# Altium PCB DamperSectionPCB.PcbDoc
Units mil, origin at the board's own origin, x right, y up, seen from the top; angles counter-clockwise.
Board outline 6000 x 6000 mil, 6 copper layers (Top Layer, Internal Plane 1, WireLayer 2, Internal Plane 2, Wire layer 3, Bottom Layer); 95 components, 69 nets, 301 pads, 27 vias.
Unrouted connection lines stored in the file: 68.
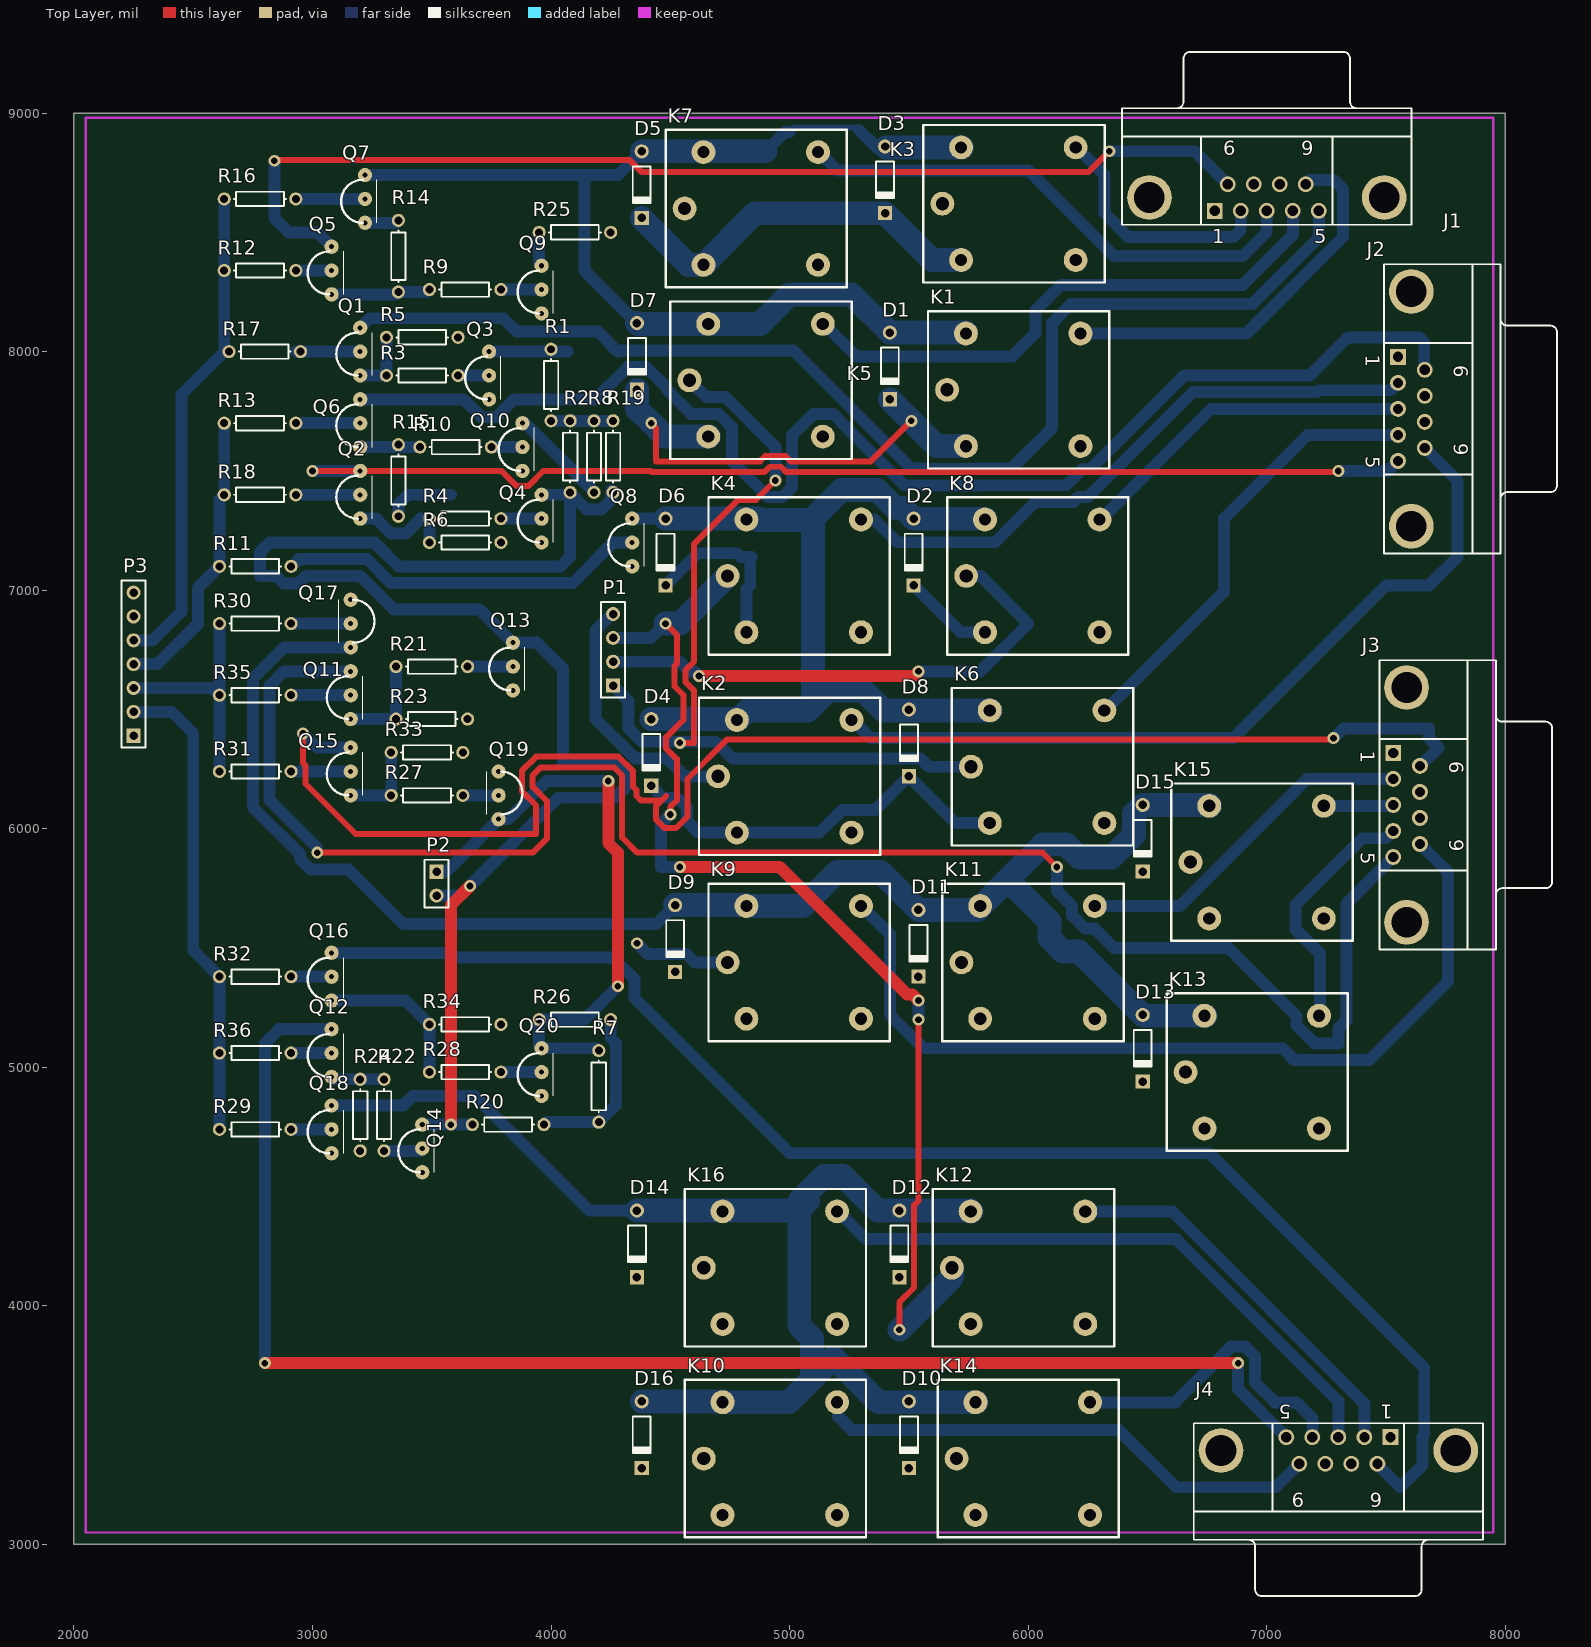
[diagram p0: Top Layer view]
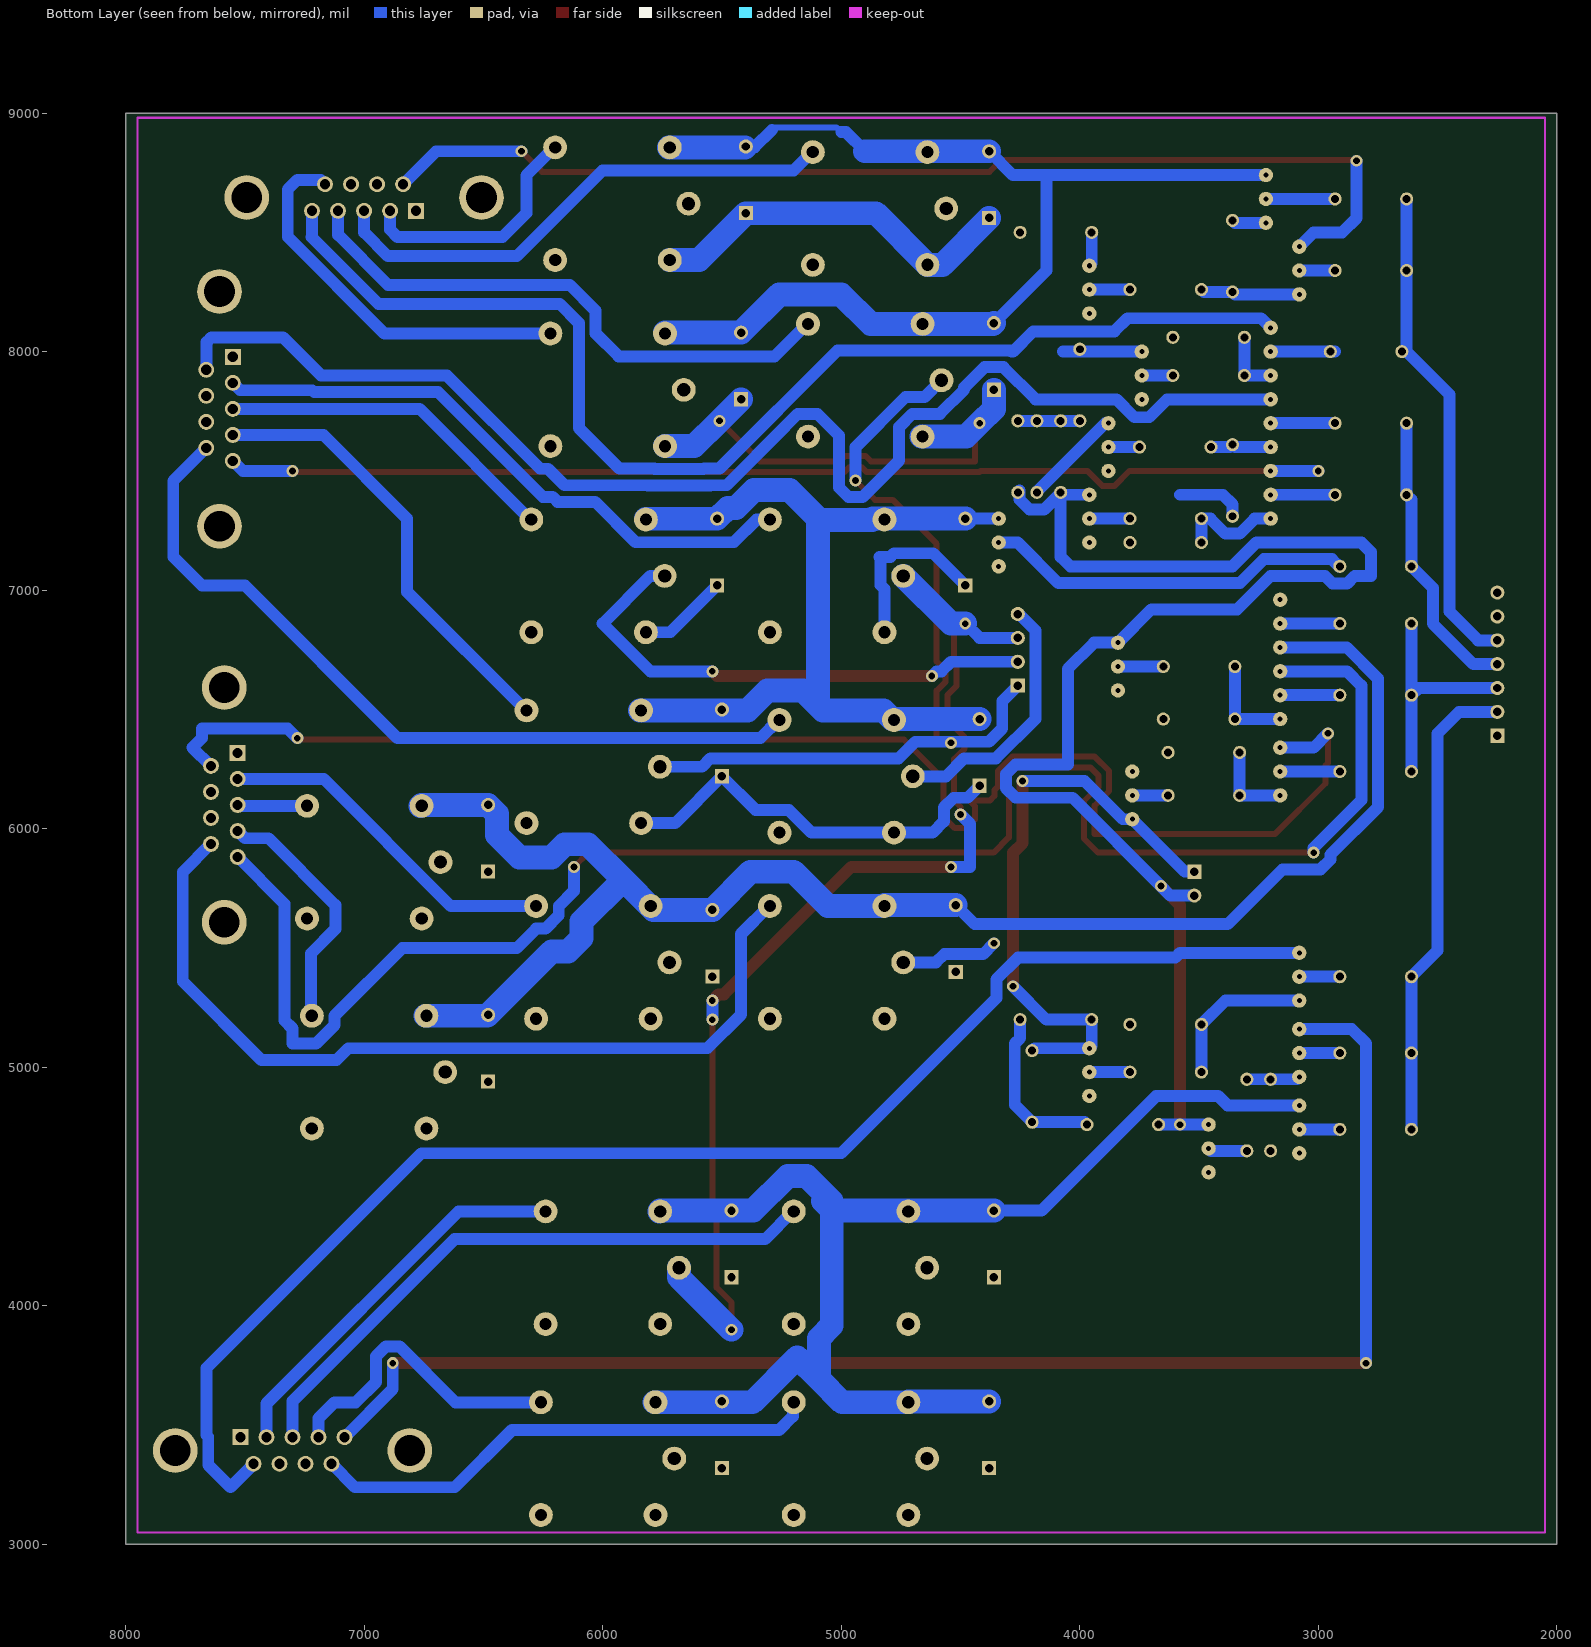
[diagram p1: Bottom Layer view, seen from below]
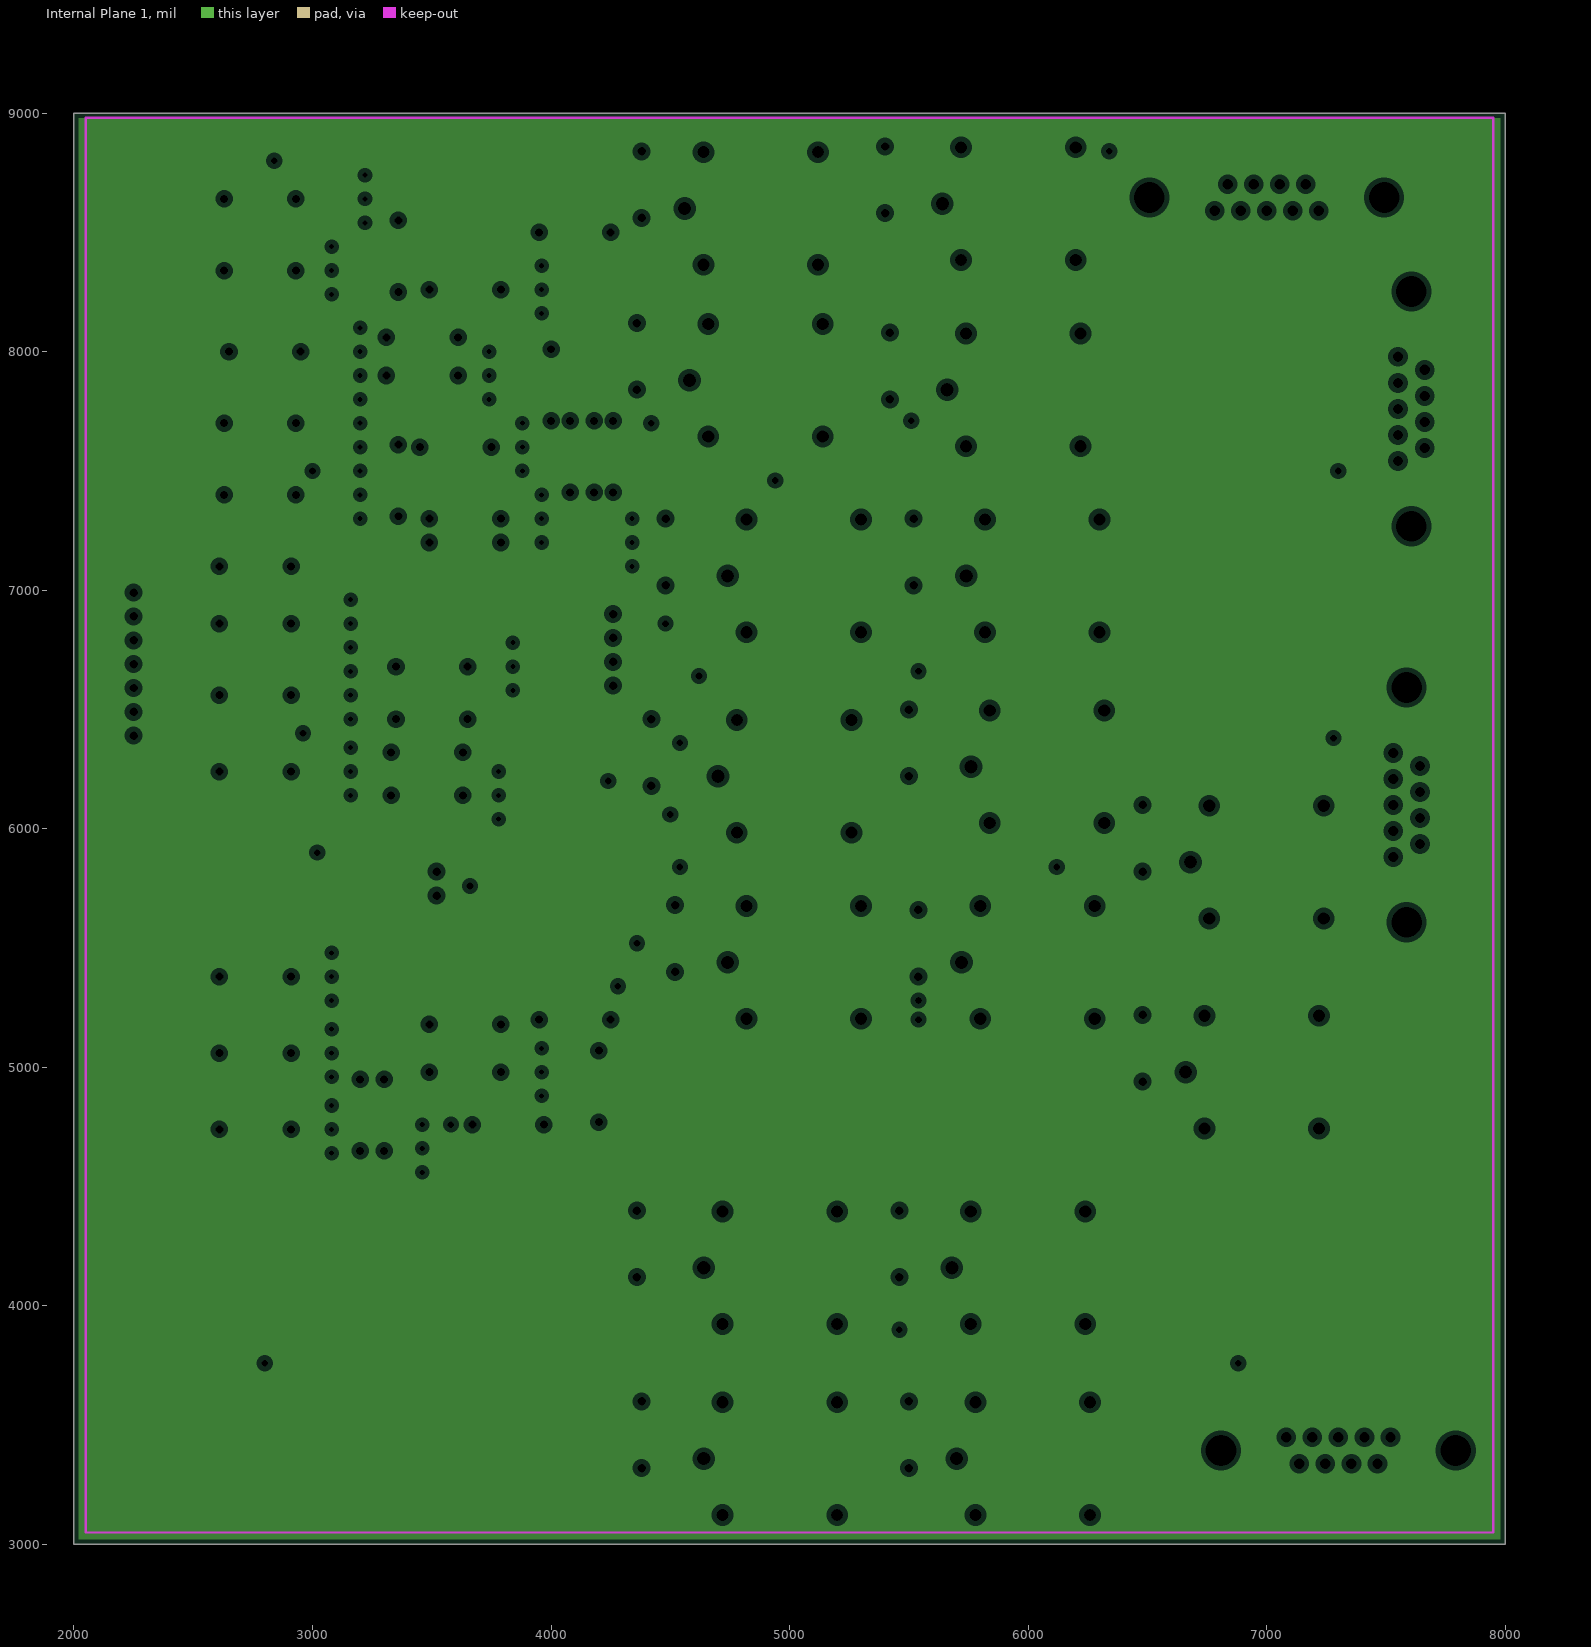
[diagram p2: Internal Plane 1, clearances drawn from the general rule]
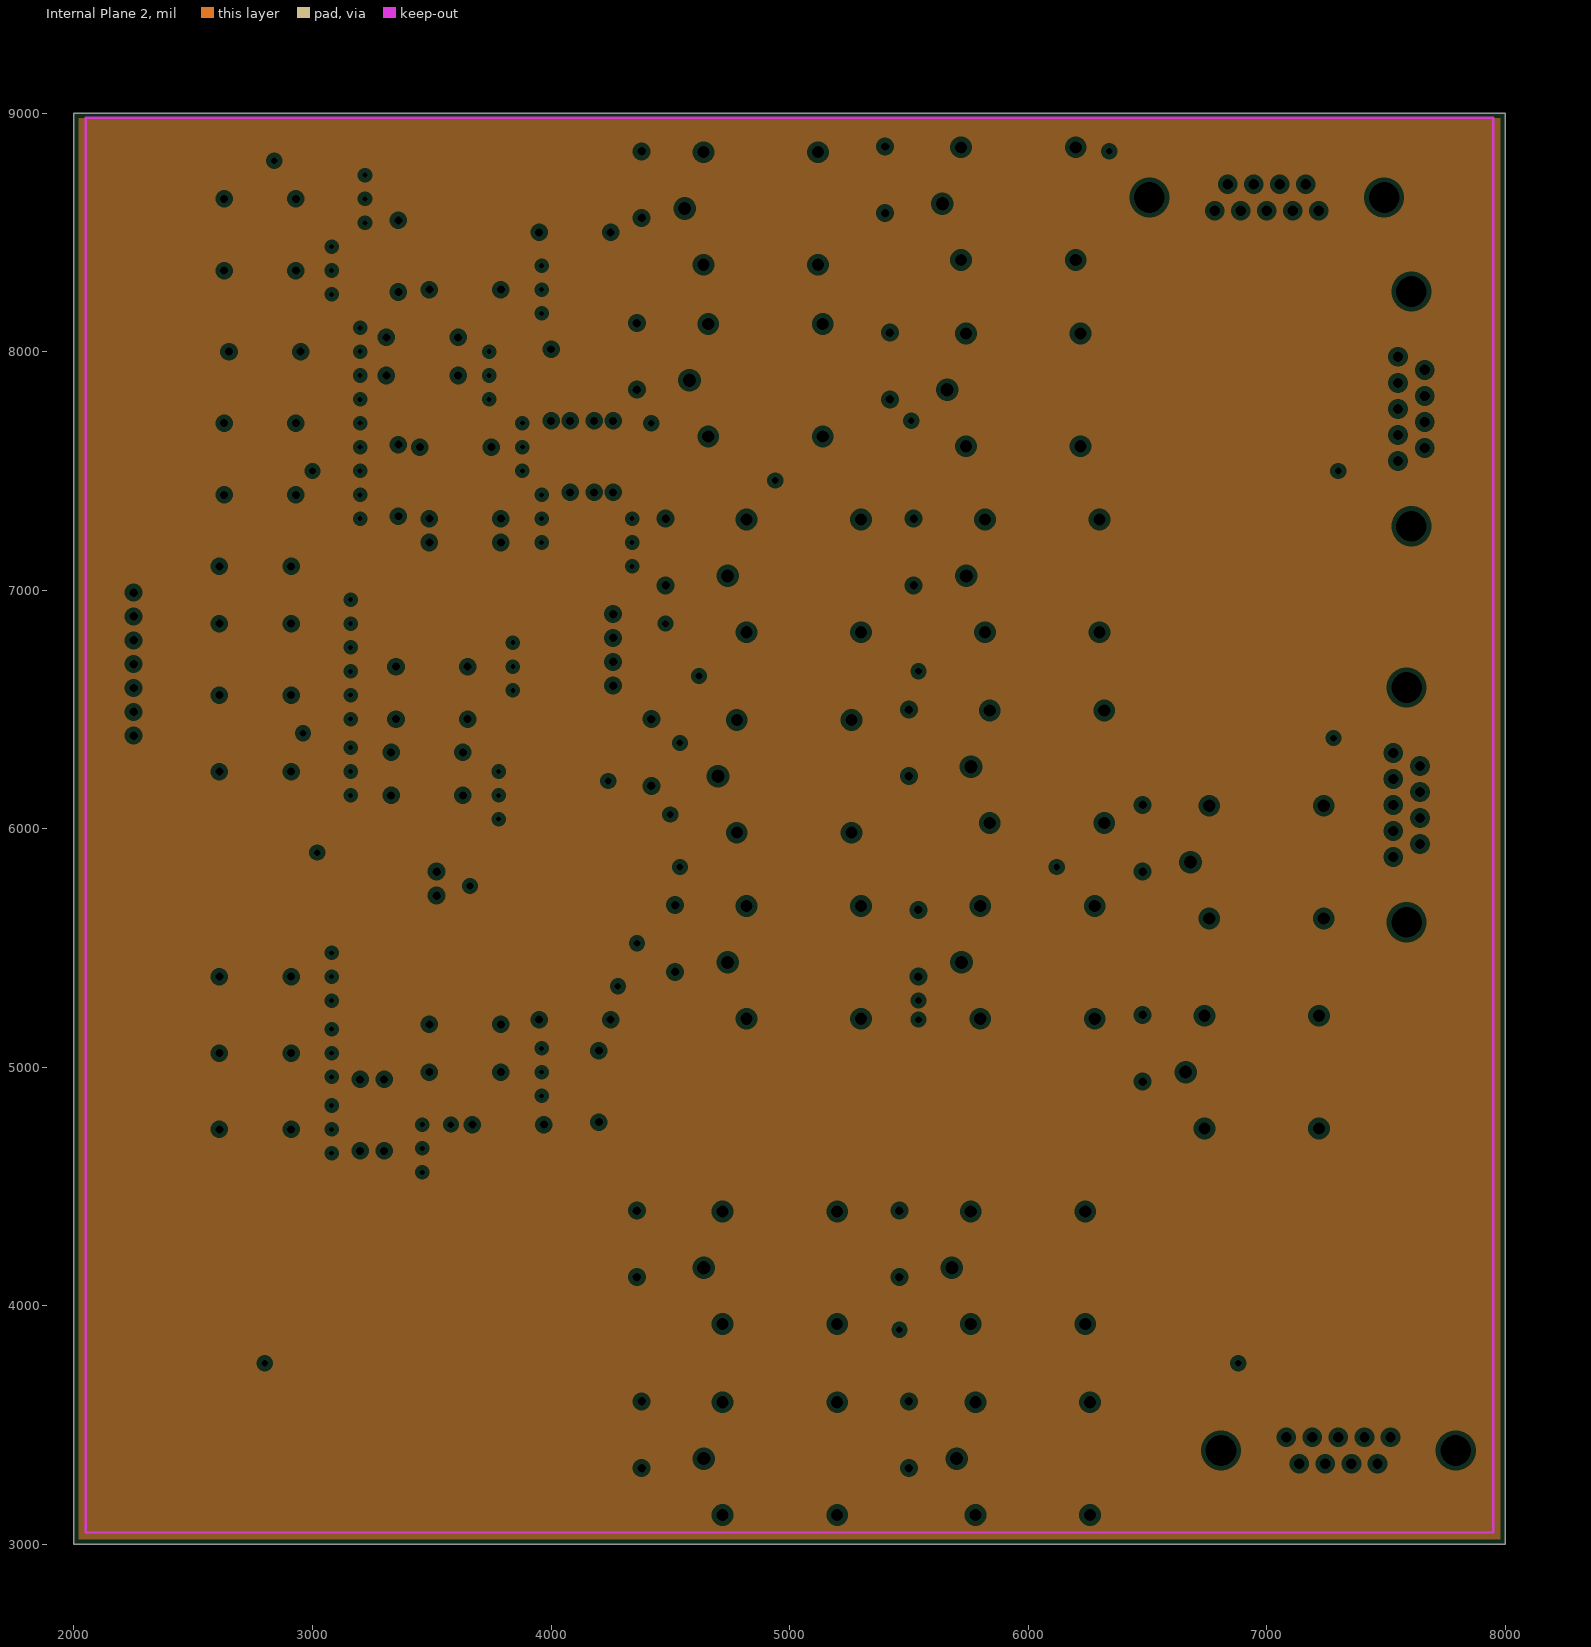
[diagram p3: Internal Plane 2, clearances drawn from the general rule]

## Layer stack, top to bottom
Top Layer: signal copper 1.4
Dielectric: core 12.6, FR-4, Dk 4.8
Internal Plane 1: plane copper 1.4
Dielectric: prepreg 12.6, FR-4, Dk 4.8
WireLayer 2: signal copper 1.4
Dielectric: core 12.6, FR-4, Dk 4.8
Internal Plane 2: plane copper 1.4
Dielectric: prepreg 12.6, FR-4, Dk 4.8
Wire layer 3: signal copper 1.4
Dielectric: core 12.6, FR-4, Dk 4.8
Bottom Layer: signal copper 1.4

## Board outline
2000,3000 8000,3000 8000,9000 2000,9000

## Design rules (kind name [scope] priority, off if disabled: settings)
Clearance [All] p1: gap=20
PlaneClearance [All] p1: clearance=20
PlaneConnect [All] p1: planeconnectstyle=Relief reliefexpansion=20 reliefentries=4 reliefconductorwidth=10 reliefairgap=10
PolygonConnect [All] p1: connectstyle=Relief reliefconductorwidth=10 reliefentries=4 polygonreliefangle="90 Angle"
RoomDefinition DamperSection [InComponentClass('DamperSection')] p1: confinementstyle=ConfineIn formatcopy=TRUE lockcomponents=FALSE outline 8045,3055 29405,3055 29405,4395 8045,4395
RoutingVias [All] p1: holewidth=32 width=62 viastyle="Through Hole" minholewidth=28 minwidth=50 maxholewidth=28 maxwidth=50
SilkscreenOverComponentPads [All] p1: minsilkscreentomaskgap=10
SolderMaskExpansion [All] p1: expansion=4
Width [All] p1: maxlimit=100 minlimit=25 preferedwidth=25 midlayer1_maxwidth=25 midlayer2_maxwidth=25 minimp=50.000000 maximp=50.000000 favimp=50.000000
25 further rules are at their usual default settings.

## Components (designator, comment, footprint, x,y, rotation, side; value= is the part's Value field where it differs from the comment)
D1 "Diode 1N4148" DO-35 5420,7940 r270 top
D2 "Diode 1N4148" DO-35 5520,7160 r270 top
D3 "Diode 1N4148" DO-35 5400,8720 r270 top
D4 "Diode 1N4148" DO-35 4420,6320 r270 top
D5 "Diode 1N4148" DO-35 4380,8700 r270 top
D6 "Diode 1N4148" DO-35 4480,7160 r270 top
D7 "Diode 1N4148" DO-35 4360,7980 r270 top
D8 "Diode 1N4148" DO-35 5500,6360 r270 top
D9 "Diode 1N4148" DO-35 4520,5540 r270 top
D10 "Diode 1N4148" DO-35 5500,3460 r270 top
D11 "Diode 1N4148" DO-35 5540,5520 r270 top
D12 "Diode 1N4148" DO-35 5460,4260 r270 top
D13 "Diode 1N4148" DO-35 6480,5080 r270 top
D14 "Diode 1N4148" DO-35 4360,4260 r270 top
D15 "Diode 1N4148" DO-35 6480,5960 r270 top
D16 "Diode 1N4148" DO-35 4380,3460 r270 top
J1 "D Connector 9" DSUB1.385-2H9 7000,9020 r0 top
J2 "D Connector 9" DSUB1.385-2H9 7980,7760 r270 top
J3 "D Connector 9" DSUB1.385-2H9 7960,6100 r270 top
J4 "D Connector 9" DSUB1.385-2H9 7300,3020 r180 top
K1 "SPDT" "Relay  SPDT Tayda" 5660,7840 r90 top
K2 "SPDT" "Relay  SPDT Tayda" 4700,6220 r90 top
K3 "SPDT" "Relay  SPDT Tayda" 5640,8620 r90 top
K4 "SPDT" "Relay  SPDT Tayda" 4740,7060 r90 top
K5 "SPDT" "Relay  SPDT Tayda" 4580,7880 r90 top
K6 "SPDT" "Relay  SPDT Tayda" 5760,6260 r90 top
K7 "SPDT" "Relay  SPDT Tayda" 4560,8600 r90 top
K8 "SPDT" "Relay  SPDT Tayda" 5740,7060 r90 top
K9 "SPDT" "Relay  SPDT Tayda" 4740,5440 r90 top
K10 "SPDT" "Relay  SPDT Tayda" 4640,3360 r90 top
K11 "SPDT" "Relay  SPDT Tayda" 5720,5440 r90 top
K12 "SPDT" "Relay  SPDT Tayda" 5680,4160 r90 top
K13 "SPDT" "Relay  SPDT Tayda" 6660,4980 r90 top
K14 "SPDT" "Relay  SPDT Tayda" 5700,3360 r90 top
K15 "SPDT" "Relay  SPDT Tayda" 6680,5860 r90 top
K16 "SPDT" "Relay  SPDT Tayda" 4640,4160 r90 top
P1 "Header 4" HDR1X4 4260,6600 r90 top
P2 "Header 2" HDR1X2 3520,5820 r270 top
P3 "Header 7" HDR1X7 2250,6390 r90 top
Q1 "2N3904" 2N3904 3200,7900 r90 top
Q2 "2N3904" 2N3904 3200,7300 r90 top
Q3 "2N3904" 2N3904 3740,7800 r90 top
Q4 "2N3904" 2N3904 3960,7200 r90 top
Q5 "2N3904" 2N3904 3080,8240 r90 top
Q6 "2N3904" 2N3904 3200,7600 r90 top
Q7 "2N3904" 2N3904 3220,8540 r90 top
Q8 "2N3904" 2N3904 4340,7100 r90 top
Q9 "2N3904" 2N3904 3960,8160 r90 top
Q10 "2N3904" 2N3904 3880,7500 r90 top
Q11 "2N3904" 2N3904 3160,6460 r90 top
Q12 "2N3904" 2N3904 3080,4960 r90 top
Q13 "2N3904" 2N3904 3840,6580 r90 top
Q14 "2N3904" 2N3904 3460,4560 r90 top
Q15 "2N3904" 2N3904 3160,6140 r90 top
Q16 "2N3904" 2N3904 3080,5280 r90 top
Q17 "2N3904" 2N3904 3160,6960 r270 top
Q18 "2N3904" 2N3904 3080,4640 r90 top
Q19 "2N3904" 2N3904 3780,6240 r270 top
Q20 "2N3904" 2N3904 3960,4880 r90 top
R1 "Res1" AXIAL-0.3 4000,7860 r270 top
R2 "Res1" AXIAL-0.3 4080,7560 r90 top
R3 "Res1" AXIAL-0.3 3460,7900 r0 top
R4 "Res1" AXIAL-0.3 3640,7300 r0 top
R5 "Res1" AXIAL-0.3 3460,8060 r180 top
R6 "Res1" AXIAL-0.3 3640,7200 r180 top
R7 "Res1" AXIAL-0.3 4200,4920 r270 top
R8 "Res1" AXIAL-0.3 4180,7560 r90 top
R9 "Res1" AXIAL-0.3 3640,8260 r0 top
R10 "Res1" AXIAL-0.3 3600,7600 r0 top
R11 "Res1" AXIAL-0.3 2760,7100 r0 top
R12 "Res1" AXIAL-0.3 2780,8340 r0 top
R13 "Res1" AXIAL-0.3 2780,7700 r0 top
R14 "Res1" AXIAL-0.3 3360,8400 r270 top
R15 "Res1" AXIAL-0.3 3360,7460 r90 top
R16 "Res1" AXIAL-0.3 2780,8640 r0 top
R17 "Res1" AXIAL-0.3 2800,8000 r0 top
R18 "Res1" AXIAL-0.3 2780,7400 r0 top
R19 "Res1" AXIAL-0.3 4260,7560 r90 top
R20 "Res1" AXIAL-0.3 3820,4760 r0 top
R21 "Res1" AXIAL-0.3 3500,6680 r0 top
R22 "Res1" AXIAL-0.3 3300,4800 r270 top
R23 "Res1" AXIAL-0.3 3500,6460 r180 top
R24 "Res1" AXIAL-0.3 3200,4800 r90 top
R25 "Res1" AXIAL-0.3 4100,8500 r0 top
R26 "Res1" AXIAL-0.3 4100,5200 r0 top
R27 "Res1" AXIAL-0.3 3480,6140 r0 top
R28 "Res1" AXIAL-0.3 3640,4980 r0 top
R29 "Res1" AXIAL-0.3 2760,4740 r0 top
R30 "Res1" AXIAL-0.3 2760,6860 r0 top
R31 "Res1" AXIAL-0.3 2760,6240 r0 top
R32 "Res1" AXIAL-0.3 2760,5380 r0 top
R33 "Res1" AXIAL-0.3 3480,6320 r180 top
R34 "Res1" AXIAL-0.3 3640,5180 r180 top
R35 "Res1" AXIAL-0.3 2760,6560 r0 top
R36 "Res1" AXIAL-0.3 2760,5060 r0 top

## Footprints (in the part's own frame and the unit in brackets; to place one, negate y for a bottom-side part, rotate by r counter-clockwise, add the part's x,y. Pads: shape width x height; smd on the part's side, far side on the other; paste and mask are expansions set on the pad)
2N3904 [mil] "simple transistor, but bigger holes and pads"
  round 60 hole 21: 1(0,0) 2(100,0) 3(200,0)
  silkscreen extent 0,-50 180,100
AXIAL-0.3 [mm] "Axial Device, Thru-Hole; 2 Leads; 0.3 in Pin Spacing"
  round 1.4 hole 0.85: 1(-3.81,0) 2(3.81,0)
  silkscreen extent -2.77,-0.76 2.77,0.76
DO-35 [mm] "Diode, Axial; Body 3.8 x 1.9 mm (LxDia. max), Lead Dia. 0.53 mm (max)"
  round 1.5 hole 0.9: 1(-3.55,0)
  rect 1.5x1.5 hole 0.9: 2(3.55,0)
  silkscreen extent -1.95,-0.95 2.05,0.95
DSUB1.385-2H9 [mm] "Connector; D Subminiature; 9 Position; Right Angle; Pitch 1.385 mm"
  rect 1.69x1.69 hole 1.09: 1(-5.54,-10.92)
  round 1.69 hole 1.09: 2(-2.77,-10.92) 3(0,-10.92) 4(2.77,-10.92) 5(5.54,-10.92) 6(-4.155,-8.08) 7(-1.385,-8.08) 8(1.385,-8.08) 9(4.155,-8.08)
  round 4.76 hole 3.26: 10(-12.495,-9.5) 11(12.495,-9.5)
  silkscreen extent -15.4,-12.4 15.4,6
HDR1X2 [mm] "Connector; Header; 2 Position"
  rect 1.5x1.5 hole 0.9: 1(0,0)
  round 1.5 hole 0.9: 2(2.54,0)
  silkscreen extent -1.27,-1.27 3.81,1.27
HDR1X4 [mm] "Connector; Header; 4 Position"
  rect 1.5x1.5 hole 0.9: 1(0,0)
  round 1.5 hole 0.9: 2(2.54,0) 3(5.08,0) 4(7.62,0)
  silkscreen extent -1.27,-1.27 8.89,1.27
HDR1X7 [mm] "Connector; Header; 7 Position"
  rect 1.5x1.5 hole 0.9: 1(0,0)
  round 1.5 hole 0.9: 2(2.54,0) 3(5.08,0) 4(7.62,0) 5(10.16,0) 6(12.7,0) 7(15.24,0)
  silkscreen extent -1.27,-1.27 16.51,1.27
"Relay  SPDT Tayda" [mm] "this is the ATTC-3372"
  round 2.54 hole 1.4: 0(0,0)
  round 2.54 hole 1.3: 1(6,-2) 2(-6,-2) 3(6,-14.2) 4(-6,-14.2)
  silkscreen extent -8.38,-17.27 8.38,2.03

## Part data
D1 D2 D3 D4 D5 D6 D7 D8 D9 D10 D11 D12 D13 D14 D15 D16: "High Conductance Fast Diode"
J1 J2 J3 J4: "Receptacle Assembly, 9 Position, Right Angle"
P1: "Header, 4-Pin"
P2: "Header, 2-Pin"
P3: "Header, 7-Pin"
Q1 Q2 Q3 Q4 Q5 Q6 Q7 Q8 Q9 Q10 Q11 Q12 Q13 Q14 Q15 Q16 Q17 Q18 Q19 Q20: "NPN General Purpose Amplifier"
R1 R2 R3 R4 R5 R6 R7 R8 R9 R10 R11 R12 R13 R14 R15 R16 R17 R18 R19 R20 R21 R22 R23 R24 R25 R26 R27 R28 R29 R30 R31 R32 R33 R34 R35 R36: "Resistor"

## Via types
v1: diameter 50, hole 28, Top Layer to Bottom Layer, 27 vias

## Nets (pads, with @x,y where several pads share a name; then routed paths per layer and width w, separated by ;. In a path a pad name is that pad's centre, name@x,y a point inside that pad or via, vN(x,y) a via of type N, cw(c..) or ccw(c..) an arc to the next point about the centre after c; other vN are vias at no path point)
BUTTONCLOSEBUS: P2.2 Q3.3 Q4.3 Q13.3 Q14.3 R1.1 R2.1 R19.1 R20.1 | length 6879.3
  Top Layer w50: v1(3580,4760) 3580,5680 v1(3660,5760)
  Bottom Layer w50: Q14.3 v1(3580,4760) R20.1 ; P2.2 3620,5720 v1(3660,5760) 4030,6130 4268.99,6130 4310,6171.01 4310,6228.99 4268.99,6270 4050,6270 4050,6670 3940,6780 Q13.3 3700,6920 3340,6920 3200,7060 2972.61,7060 2940.05,7027.44 2879.95,7027.44 2847.39,7060 2780,7060 2780,7160 2820,7200 3260,7200 3360,7100 4040,7100 4080,7140 R2.1@4080,7407.39 ; Q3.3 4070,8000 ; Q4.3 4070,7400 R2.1 R2.1@4080,7407.39 ; R19.1 4252.56,7417.44 4252.56,7379.95 4210.05,7337.44 4149.95,7337.44 R2.1@4080,7407.39
BUTTONOPENBUS: P2.1 Q9.3 Q10.3 Q19.3 Q20.3 R7.1 R8.1 R25.1 R26.1 | length 3076
  Top Layer w50: v1(4240,6200) 4240,5940 4280,5900 v1(4280,5340)
  Bottom Layer w50: P2.1 3560,5820 Q19.3 3820,6040 3980,6200 v1(4240,6200) ; Q10.3 3892.61,7700 4180,7412.61 R8.1 ; R25.1 3950,8370 Q9.3 ; R7.1 4190,5080 Q20.3 3950,5090 R26.1 4140,5200 v1(4280,5340)
COILA1BUS: K1.0 K2.0 K9.0 K10.0 P1.4 | length 1500.6
  Bottom Layer w50: P1.4 4254.6,6900 4185.47,6830.87 4185.47,6460.95 4351.65,6294.76 4485.24,6294.76 4560,6220 K2.0 ; v1(4360,5520) 4405.24,5474.76 4568.17,5474.76 4602.93,5440 K9.0
COILA2BUS: K3.0 K4.0 K11.0 K12.0 P1.3 | length 4799.1
  Top Layer w25: v1(4480,6860) 4527.03,6812.97 4527.03,6691.98 4517.5,6682.46 4517.5,6597.54 4555,6560.04 4555,6456.32 4482.5,6383.82 4482.5,6336.18 4527.03,6291.66 4527.03,6118.61 4500,6091.58 v1(4500,6060) ; v1(5460,3900) 5460,4015.22 5522.03,4077.25 5522.03,4422.03 5540,4440 v1(5540,5200)
  Top Layer w50: v1(4540,5840) 4957.54,5840 5491.83,5305.71 5514.29,5305.71 v1(5540,5280)
  Bottom Layer w50: P1.3 4420,6800 v1(4480,6860) ; v1(4500,6060) 4460,6020 4460,5840 v1(4540,5840) ; v1(5540,5200) v1(5540,5280)
  Bottom Layer w100: v1(4480,6860) 4540,6860 K4.0 ; v1(5460,3900) 5680,4120 K12.0
COILB1BUX: K7.0 K8.0 K15.0 K16.0 P1.2 | length 2198.8
  Top Layer w50: v1(4620,6640) 5520,6640 v1(5540,6660)
  Bottom Layer w50: P1.2 4540,6700 4580,6660 4600,6660 v1(4620,6640) ; v1(5540,6660) 5800,6660 6000,6860 5800,7060 K8.0
COILB2BUS: K5.0 K6.0 K13.0 K14.0 P1.1 | length 3699.5
  Top Layer w25: v1(4540,6360) 4600,6360 4600,6578.68 4562.5,6616.18 4562.5,6663.82 4600,6701.32 4600,7194.15 4784.57,7378.72 4858.72,7378.72 v1(4940,7460)
  Bottom Layer w50: P1.1 4325,6535 4325,6420.41 4380.65,6364.76 4689.59,6364.76 4759.59,6294.76 5548.17,6294.76 5582.93,6260 K6.0 ; K5.0 4651,7809 4731.35,7809 4940,7600.35 v1(4940,7460)
DAMPER1: P3.5 R12.1 R16.1 R17.1 | length 2054.3
  Bottom Layer w50: P3.5 2330,6790 2450,6910 2450,7820 2630,8000 R12.1 R16.1
DAMPER2: P3.4 R11.1 R13.1 R18.1 | length 1226
  Bottom Layer w50: P3.4 2350,6690 2520,6860 2520,7010 R11.1 2610,7380 R18.1 R13.1
DAMPER3: P3.3 R30.1 R31.1 R35.1 | length 992.4
  Bottom Layer w50: P3.3 2580,6590 R35.1 ; R31.1 R35.1 ; R30.1 R35.1
DAMPER4: P3.2 R29.1 R32.1 R36.1 | length 1992.8
  Bottom Layer w50: P3.2 2410,6490 2500,6400 2500,5490 R32.1 R36.1 R29.1
GND: J1.10 J1.11 J2.10 J2.11 J3.10 J3.11 J4.10 J4.11 P3.1 Q3.1 Q4.1 Q7.1 Q8.1 Q9.1 Q10.1 Q13.1 Q14.1 Q17.1 Q18.1 Q19.1 Q20.1 R5.1 R6.1 R14.1 R15.1 R23.1 R24.1 R33.1 R34.1 | length 416.6
  Bottom Layer w50: Q7.1 R14.1@3350,8540 ; R15.1 3360,7360 3400,7400 3580,7400
NetD1_1: D1.1 D3.1 D5.1 D7.1 K1.1 K3.1 K5.1 K7.1 Q7.3 | length 4822.7
  Bottom Layer w25: 5000,8920 5020,8940 5280,8940 5290,8930
  Bottom Layer w50: Q7.3 4140,8740 ; D7.1 4140,8339.76 4140,8740 ; D5.1 4280.24,8740 4140,8740 ; 4900,8840 4980,8920 5000,8920 ; 5290,8930 5364,8856 D3.1@5403.76,8856
  Bottom Layer w100: D7.1 4363.76,8116 4876,8116 5000,8240 5259.76,8240 D1.1 K1.1@5739.24,8079.76 ; D5.1 K7.1@4679.24,8839.76 ; K7.1@4687,8840 4900,8840 ; D3.1@5403.76,8856 K3.1@5723,8856
NetD2_1: D2.1 D4.1 D6.1 D8.1 K2.1 K4.1 K6.1 K8.1 Q8.3 | length 3858.5
  Bottom Layer w50: Q8.3 D6.1@4479.76,7300
  Bottom Layer w100: D4.1 4786.76,6459.76 4823,6496 5076,6496 5160,6580 5308.71,6580 5392.71,6496 K6.1@5843,6496 ; D6.1@4479.76,7300 4866.65,7300 4871.65,7295 5092.29,7295 5097.29,7300 ; 5097.29,6532 5097.29,7300 ; K8.1@5819.24,7299.76 D2.1 5474.76,7345 5440.65,7345 5365.65,7420 5217.29,7420 5097.29,7300
NetD9_1: D9.1 D11.1 D13.1 D15.1 K9.1 K11.1 K13.1 K15.1 Q17.3 | length 6776.8
  Bottom Layer w50: Q17.3 2881.01,6760 2750,6628.99 2750,6091.01 2950,5891.01 2950,5871.01 2991.01,5830 3150,5830 3380,5600 4440.24,5600 D9.1
  Bottom Layer w100: D9.1 4819.24,5679.76 4823,5676 5056,5676 5200,5820 5379.76,5820 D11.1 5786.76,5659.76 5907,5780 ; D13.1 6213.54,5486.22 6144.7,5486.22 6089.06,5541.87 6089.06,5610.71 5919.76,5780 5907,5780 ; D13.1@6483.76,5216 K13.1@6743,5216 ; K15.1@6763,6096 6759.24,6099.76 D15.1 6443,6062.76 6443,5974.29 6348.71,5880 6214.35,5880 6159.35,5935 6062,5935 5907,5780
NetD10_1: D10.1 D12.1 D14.1 D16.1 K10.1 K12.1 K14.1 K16.1 Q18.3 | length 5381.7
  Bottom Layer w50: Q18.3 3380,4840 3420,4880 3680,4880 4160.24,4399.76 D14.1
  Bottom Layer w100: D14.1 5037.06,4399.76 5077.29,4440 ; D16.1 K10.1@4719.24,3599.76 ; K10.1@4723,3596 4996,3596 5093.29,3693.29 ; K12.1@5763,4396 5759.24,4399.76 D12.1 5368.94,4399.76 5223.71,4545 5145,4545 5040,4440 5040,3917.29 5093.29,3864 5093.29,3693.29 ; K14.1@5783,3596 5372.71,3596 5184.35,3784.35 5093.29,3693.29
NetJ1_2: J1.2 K3.3 | length 1028.8
  Bottom Layer w50: K3.3@6203,8856 6320,8739 6320,8580 6420,8480 6860,8480 6890.94,8510.94 J1.2
NetJ1_3: J1.3 K7.3 | length 2189.1
  Bottom Layer w50: K7.3@5123,8836 5199,8760 6000,8760 6360,8400 6900,8400 7000,8500 J1.3
NetJ1_4: J1.4 K5.3 | length 2390.1
  Bottom Layer w50: K5.3@5143,8116 5279,7980 5933.35,7980 6030,8076.65 6030,8171.99 6138.01,8280 6900,8280 7109.06,8489.06 J1.4
NetJ1_5: J1.5 Q1.3 | length 5073.3
  Bottom Layer w50: Q1.3 3240,8140 3800,8140 3855,8085 4195,8085 4280,8000 4286.42,8000 4291.65,8005.24 5015.11,8005.24 5510.35,7510 5575.89,7510 5577.11,7508.78 5782.13,7508.78 5783.35,7510 5930,7510 6100,7680 6100,8120 6180,8200 6940,8200 7220,8480 7218.11,8481.89 J1.5
NetJ1_6: J1.6 Q5.3 | length 4640.5
  Top Layer w25: v1(2840,8800) 2842.5,8802.5 4329.54,8802.5 4378.54,8753.5 6253.5,8753.5 v1(6340,8840)
  Bottom Layer w50: v1(2840,8800) 2840,8560 2900,8500 3020,8500 Q5.3 ; v1(6340,8840) 6698.31,8840 J1.6
NetJ1_9: J1.9 K1.3 | length 1644.2
  Bottom Layer w50: K1.3@6223,8076 6914.99,8076 7320,8481.01 7320,8680 7280,8720 7181.69,8720 J1.9
NetJ2_2: J2.2 K4.3 | length 2563.1
  Bottom Layer w50: K4.3@5303,7296 5355.3,7296 5450.3,7201 5862.35,7201 6031.35,7370 6188.99,7370 6209.99,7391 6251,7391 6690,7830 7208.99,7830 7217.26,7838.27 7519.29,7838.27 J2.2
NetJ2_3: J2.3 K8.3 | length 1439.3
  Bottom Layer w50: K8.3@6303,7296 6767,7760 J2.3
NetJ2_4: J2.4 K6.3 | length 1885.3
  Bottom Layer w50: K6.3@6323,6496 6820,6993 6820,7300 7170.94,7650.94 J2.4
NetJ2_5: J2.5 Q2.3 | length 4842
  Top Layer w25: v1(3000,7500) Q2.3 3791.61,7500 3854.11,7437.5 3905.89,7437.5 3968.39,7500 4416.36,7500 4421.36,7495 4893.68,7495 4916.18,7517.5 4963.82,7517.5 4986.32,7495 7295,7495 v1(7300,7500)
  Bottom Layer w50: v1(3000,7500) Q2.3 ; v1(7300,7500) 7508.19,7500 J2.5
NetJ2_6: J2.6 Q6.3 | length 5671.7
  Bottom Layer w50: Q6.3 3633.93,7800 3708.93,7725 3771.07,7725 3846.07,7800 4185.41,7800 4320.65,7935.24 4399.35,7935.24 4485,7849.59 4485,7840.65 4586.65,7739 4702.35,7739 4758,7683.35 4758,7543.01 4911.01,7390 4968.99,7390 5010,7431.01 5010,7649.07 5099.93,7739 5182.35,7739 5238,7683.35 5238,7682 5480,7440 5546.89,7440 5548.11,7438.78 5811.12,7438.78 5812.35,7440 6160,7440 6229,7509 6262.35,7509 6653.35,7900 7180,7900 7340,8060 7640,8060 7660,8040 7660,7925.47 J2.6
NetJ2_9: J2.9 K2.3 | length 3396.9
  Bottom Layer w50: K2.3@5263,6456 5339,6380 6860,6380 7500,7020 7680,7020 7800,7140 7800,7458.31 J2.9
NetJ3_2: J3.2 K11.3 | length 1467.9
  Bottom Layer w50: K11.3@6283,5676 6636,5676 7169.06,6209.06 J3.2
NetJ3_3: J3.3 K15.3 | length 288.7
  Bottom Layer w50: K15.3@7243,6096 7526.08,6096 J3.3
NetJ3_4: J3.4 K13.3 | length 1045.5
  Bottom Layer w50: K13.3@7223,5216 7223,5477 7120,5580 7120,5680 7400.16,5960.16 7499.29,5960.16 J3.4
NetJ3_5: J3.5 Q11.3 | length 7429.1
  Top Layer w25: v1(3020,5900) 3923.64,5900 3982.5,5958.86 3982.5,6116.18 3922.5,6176.18 3922.5,6223.82 3956.18,6257.5 4263.82,6257.5 4297.5,6223.82 4297.5,5963.82 4361.32,5900 6060,5900 v1(6120,5840)
  Bottom Layer w50: v1(3020,5900) 3020,5920 2820,6120 2820,6600 2880,6660 Q11.3 ; v1(6120,5840) 6120,5740 6184.06,5675.94 6184.06,5636.87 6239.7,5581.22 6278.78,5581.22 6360,5500 6840,5500 7124.06,5215.94 7124.06,5176.87 7200.93,5100 7300,5100 7300,5162.82 7334.06,5196.87 7334.06,5685.87 J3.5
NetJ3_6: J3.6 Q15.3 | length 6367
  Top Layer w25: v1(2960,6400) 2960,6274.94 2970.06,6264.88 2970.06,6189.94 3182.5,5977.5 3937.5,5977.5 3937.5,6097.54 3877.5,6157.54 3877.5,6242.46 3937.54,6302.5 4282.46,6302.5 4342.5,6242.46 4342.5,6177.5 4357.97,6162.03 4357.97,6137.25 4377.01,6118.21 4462.99,6118.21 ; 4482.03,6137.25 4439.21,6094.43 4439.21,6039.47 4476.18,6002.5 4523.82,6002.5 4572.03,6050.71 4572.03,6208.7 4736.83,6373.5 7273.5,6373.5 v1(7280,6380)
  Bottom Layer w50: v1(2960,6400) 3020,6340 Q15.3 ; v1(7280,6380) 7320,6420 7680,6420 7680,6380 7720,6340 7643.58,6263.58 J3.6
NetJ3_9: J3.9 K9.3 | length 3684.6
  Bottom Layer w50: K9.3@5303,5676 5420,5559 5420,5221.01 5561.01,5080 7066.28,5080 7116.28,5030 7430,5030 7760,5360 7760,5818.31 J3.9
NetJ4_2: J4.2 K12.3 | length 1640.5
  Bottom Layer w50: K12.3@6243,4396 6604,4396 7409.06,3590.94 J4.2
NetJ4_3: J4.3 K16.3 | length 2577.4
  Bottom Layer w50: K16.3@5203,4396 5319,4280 6621.01,4280 7300,3601.01 J4.3
NetJ4_4: J4.4 K14.3 | length 1292
  Bottom Layer w50: K14.3@6263,3596 6617.01,3596 6851.01,3830 6908.99,3830 6950,3788.99 6950,3680.81 7034.81,3596 7124,3596 7190.94,3529.05 J4.4
NetJ4_5: J4.5 Q12.3 | length 6118.6
  Top Layer w50: v1(2800,3760) v1(6880,3760)
  Bottom Layer w50: v1(2800,3760) 2800,5100 2860,5160 Q12.3 ; v1(6880,3760) 6880,3651.81 J4.5
NetJ4_6: J4.6 Q16.3 | length 6026.5
  Bottom Layer w50: Q16.3 3580,5480 3600,5460 4258.99,5460 4350,5368.99 4350,5290 5000,4640 6760,4640 7660,3740 7660,3458.24 7653.23,3451.47 7653.23,3333.23 7560,3240 7463.58,3336.42 J4.6
NetJ4_9: J4.9 K10.3 | length 2156.1
  Bottom Layer w50: K10.3@5203,3596 5203,3537 5260,3480 6380,3480 6620,3240 7038.31,3240 J4.9
NetQ1_1: Q1.1 R3.1 R5.2 | length 270
  Bottom Layer w50: Q1.1 R3.1 R5.2
NetQ1_2: Q1.2 R17.2 | length 270
  Bottom Layer w50: R17.2@2930,8000 Q1.2
NetQ2_1: Q2.1 R4.1 R6.2 | length 441.8
  Bottom Layer w50: Q2.1 3267.39,7300 3329.95,7237.44 3390.05,7237.44 3452.61,7300 R4.1 R6.2
NetQ2_2: Q2.2 R18.2 | length 270
  Bottom Layer w50: R18.2 Q2.2
NetQ3_2: Q3.2 R3.2 | length 130
  Bottom Layer w50: R3.2 Q3.2
NetQ4_2: Q4.2 R4.2 | length 170
  Bottom Layer w50: R4.2 Q4.2
NetQ5_1: Q5.1 R9.1 R14.2 | length 404.1
  Bottom Layer w50: Q5.1 3350,8240 R14.2 R9.1@3480,8250
NetQ5_2: Q5.2 R12.2 | length 150
  Bottom Layer w50: R12.2 Q5.2
NetQ6_1: Q6.1 R10.1 R15.2 | length 258.3
  Bottom Layer w50: Q6.1 3350,7600 R15.2 3370,7600 R10.1
NetQ6_2: Q6.2 R13.2 | length 270
  Bottom Layer w50: R13.2 Q6.2
NetQ7_2: Q7.2 R16.2 | length 290
  Bottom Layer w50: R16.2 Q7.2
NetQ8_2: Q8.2 R11.2 | length 1554.3
  Bottom Layer w50: R11.2 2913.62,7100 2943.62,7130 3228.99,7130 3328.99,7030 4090,7030 4260,7200 Q8.2
NetQ9_2: Q9.2 R9.2 | length 170
  Bottom Layer w50: R9.2 Q9.2
NetQ10_2: Q10.2 R10.2 | length 130
  Bottom Layer w50: R10.2 Q10.2
NetQ11_1: Q11.1 R21.1 R23.2 | length 410
  Bottom Layer w50: Q11.1 R23.2 R21.1
NetQ11_2: Q11.2 R35.2 | length 250
  Bottom Layer w50: R35.2 Q11.2
NetQ12_1: Q12.1 R22.1 R24.2 | length 224.1
  Bottom Layer w50: Q12.1 3090,4950 R24.2 R22.1
NetQ12_2: Q12.2 R36.2 | length 170
  Bottom Layer w50: R36.2 Q12.2
NetQ13_2: Q13.2 R21.2 | length 190
  Bottom Layer w50: R21.2 Q13.2
NetQ14_2: Q14.2 R22.2 | length 164.1
  Bottom Layer w50: R22.2 3450,4650 Q14.2
NetQ15_1: Q15.1 R27.1 R33.2 | length 350
  Bottom Layer w50: Q15.1 R27.1 R33.2
NetQ15_2: Q15.2 R31.2 | length 250
  Bottom Layer w50: R31.2 Q15.2
NetQ16_1: Q16.1 R28.1 R34.2 | length 651.4
  Bottom Layer w50: Q16.1 3390,5280 R34.2 R28.1
NetQ16_2: Q16.2 R32.2 | length 170
  Bottom Layer w50: R32.2 Q16.2
NetQ17_2: Q17.2 R30.2 | length 250
  Bottom Layer w50: R30.2 Q17.2
NetQ18_2: Q18.2 R29.2 | length 170
  Bottom Layer w50: R29.2 Q18.2
NetQ19_2: Q19.2 R27.2 | length 150
  Bottom Layer w50: R27.2 Q19.2
NetQ20_2: Q20.2 R28.2 | length 170
  Bottom Layer w50: R28.2 Q20.2
VCC: P3.7 R1.2 R2.2 R7.2 R8.2 R19.2 R20.2 R25.2 R26.2 | length 963.5
  Bottom Layer w50: R20.2 3980,4770 R7.2 4272.56,4842.56 4272.56,5100.05 4250,5122.61 R26.2 ; R1.2 R2.2 R8.2 R19.2
VCC12: D1.2 D2.2 D3.2 D4.2 D5.2 D6.2 D7.2 D8.2 D9.2 D10.2 D11.2 D12.2 D13.2 D14.2 D15.2 D16.2 J1.1 J2.1 J3.1 J4.1 K1.2 K2.2 K3.2 K4.2 K5.2 K6.2 K7.2 K8.2 K9.2 K10.2 K11.2 K12.2 K13.2 K14.2 K15.2 K16.2 P3.6 | length 6590.6
  Top Layer w25: v1(4420,7700) 4440,7680 4440,7540 4875.04,7540 4897.54,7562.5 4982.46,7562.5 5004.96,7540 5340,7540 v1(5510.12,7710.12)
  Bottom Layer w50: D4.2 4470.24,6130 4528.99,6130 4570,6088.99 4570,6031.01 4617.23,5983.78 K2.2 5124.7,5983.78 5219.7,6078.78 5358.54,6078.78 D8.2 5696.46,6023.78 K6.2 ; D6.2 4614.76,7155 4779.35,7155 4794.35,7140 4840,7140 4835,7135 4835,7020.65 4818.74,7004.39 K4.2 ; D2.2 5716.46,6823.78 K8.2
  Bottom Layer w100: D7.2 4360,7760 v1(4420,7700) 4476,7644 K5.2@4663,7644 ; D5.2 4576.46,8363.78 K7.2 4855.2,8580.24 D3.2 5596.46,8383.78 K3.2 ; D1.2 v1(5510.12,7710.12) 5616.46,7603.78 K1.2
pads on no net: J1.7 J1.8 J2.7 J2.8 J3.7 J3.8 J4.7 J4.8 K1.4 K2.4 K3.4 K4.4 K5.4 K6.4 K7.4 K8.4 K9.4 K10.4 K11.4 K12.4 K13.4 K14.4 K15.4 K16.4

## Polygon pours and split planes (outlines as drawn)
no net on Internal Plane 1 (split plane): 7979.9,3020.1 2020.1,3020.1 2020.1,8979.9 7979.9,8979.9
no net on Internal Plane 2 (split plane): 7979.9,3020.1 2020.1,3020.1 2020.1,8979.9 7979.9,8979.9

## Keep-outs
Keep-Out Layer:
  lines w10: 2050,3050 2050,8980 7950,8980 7950,3050 2050,3050

## Silkscreen, mask and mechanical layers (free items; w line width, h text height)
Drill Drawing:
  text ".LEGEND" at 8200,3200 h60
  text "Drill Drawing." at 8200,3100 h60

## Dimensions
2050,3050 to 2050,8980 on Mechanical 1
2050,3050 to 7950,3050 on Mechanical 1

## Text inside footprints (layer, text, board x,y; h text height)
J1: Top Overlay "6" at 6816.73,8824.13 h59.06; Top Overlay "9" at 7143.9,8824.13 h59.06; Top Overlay "5" at 7198.43,8454.06 h59.06; Top Overlay "1" at 6772.05,8454.06 h59.06
J2: Top Overlay "6" at 7784.13,7943.27 h59.06 r270; Top Overlay "9" at 7784.13,7616.1 h59.06 r270; Top Overlay "5" at 7414.06,7561.57 h59.06 r270; Top Overlay "1" at 7414.06,7987.95 h59.06 r270
J3: Top Overlay "6" at 7764.13,6283.27 h59.06 r270; Top Overlay "9" at 7764.13,5956.1 h59.06 r270; Top Overlay "5" at 7394.06,5901.57 h59.06 r270; Top Overlay "1" at 7394.06,6327.95 h59.06 r270
J4: Top Overlay "6" at 7483.27,3215.87 h59.06 r180; Top Overlay "9" at 7156.1,3215.87 h59.06 r180; Top Overlay "5" at 7101.57,3585.94 h59.06 r180; Top Overlay "1" at 7527.95,3585.94 h59.06 r180